# Altium PCB Converter_Module_PT100_V2l1.PcbDoc
Units mm, origin at the board's own origin, x right, y up, seen from the top; angles counter-clockwise.
Board outline 41 x 41 mm, 4 copper layers (L1, L2(GND), L3(PWR), L4), stack 0.778 mm thick; 46 components, 37 nets, 172 pads, 52 vias.
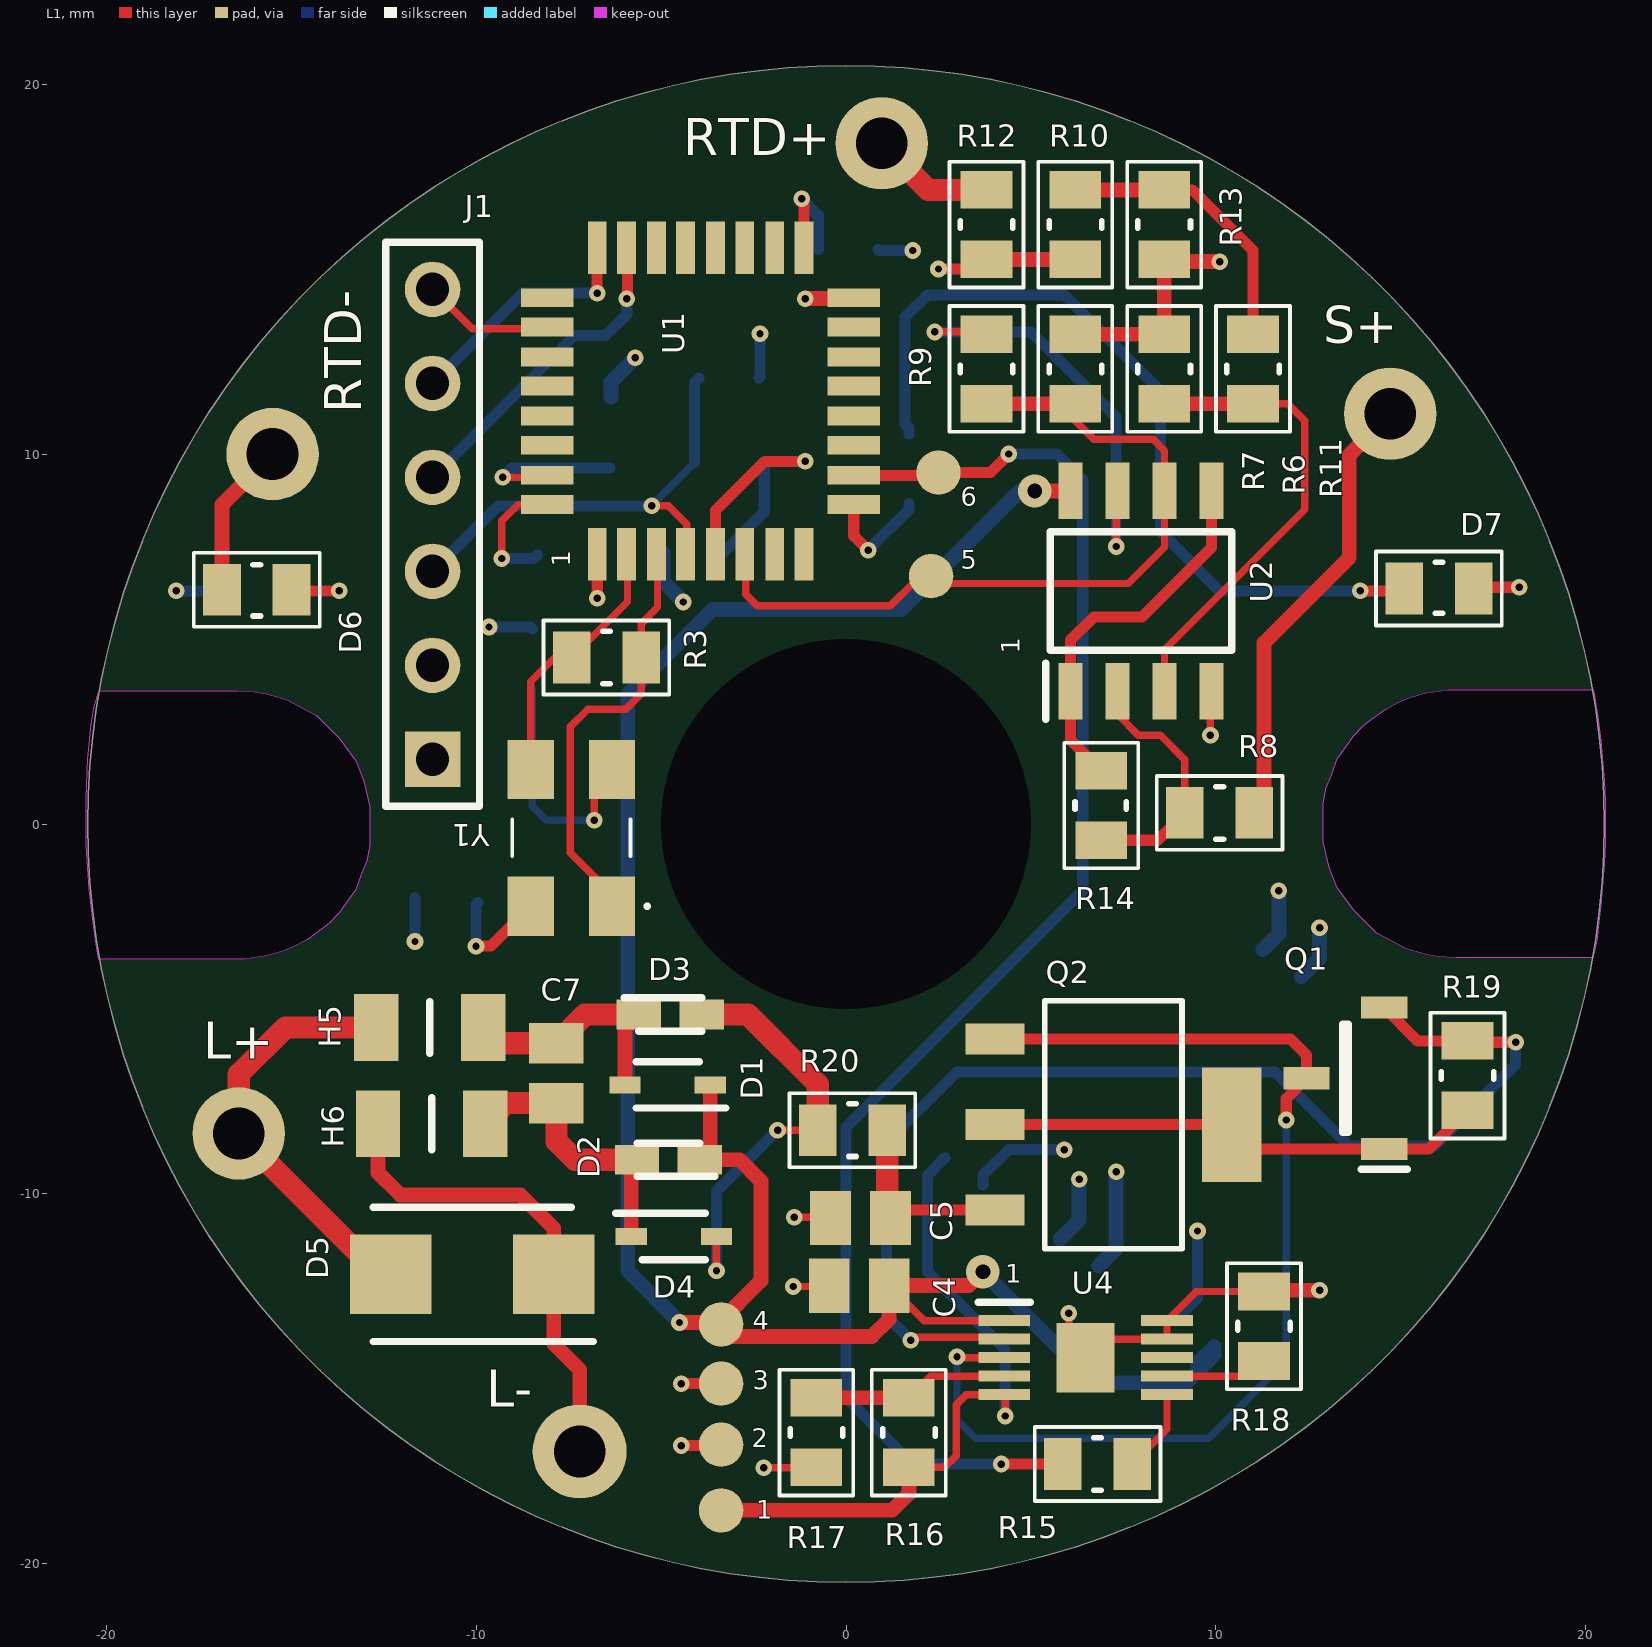
[diagram p0: L1 view]
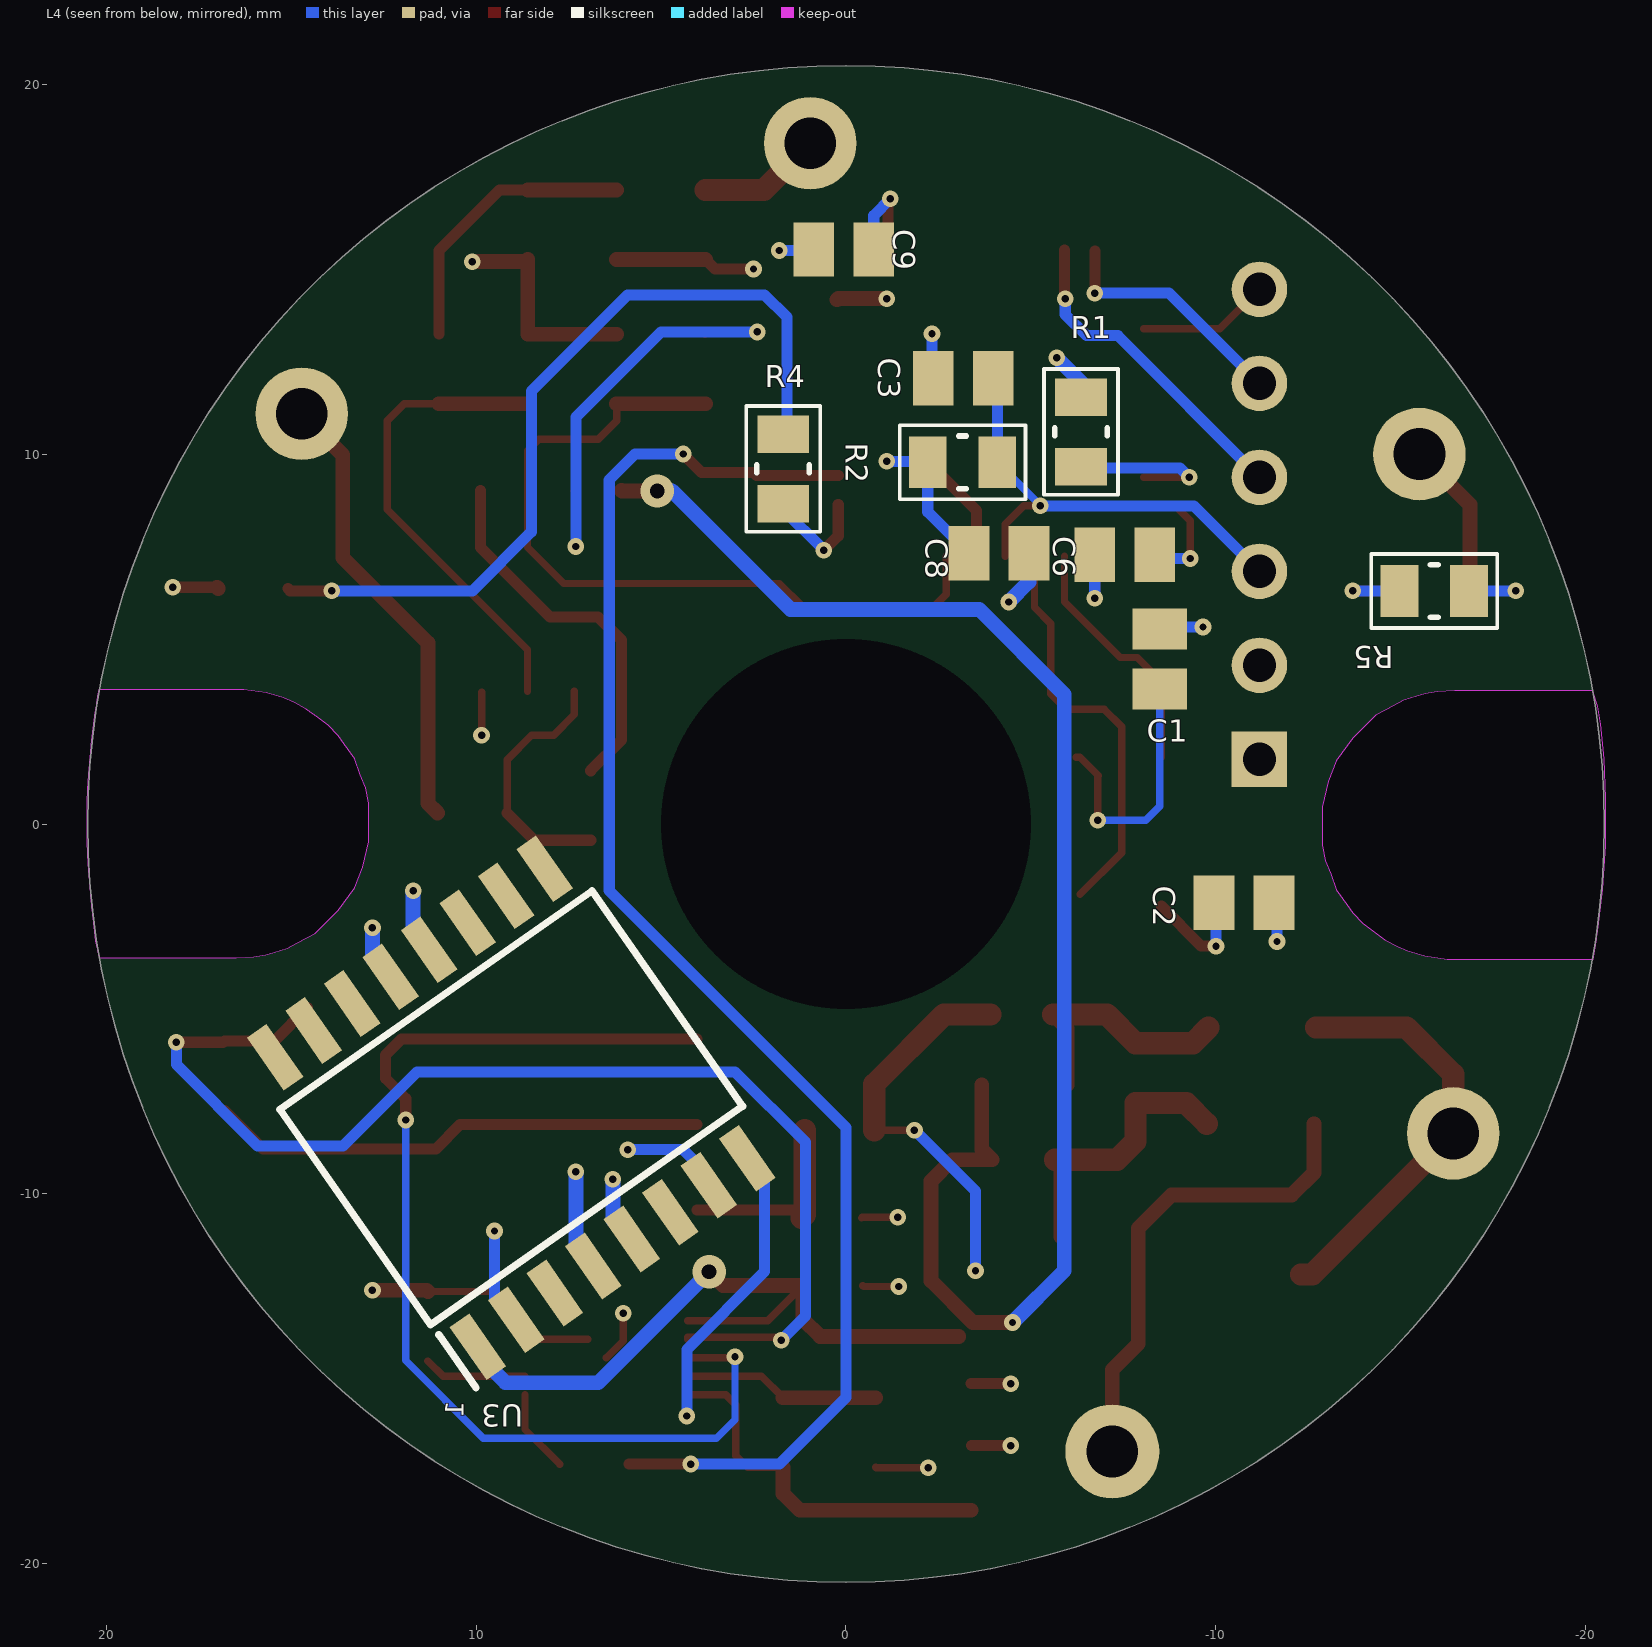
[diagram p1: L4 view, seen from below]
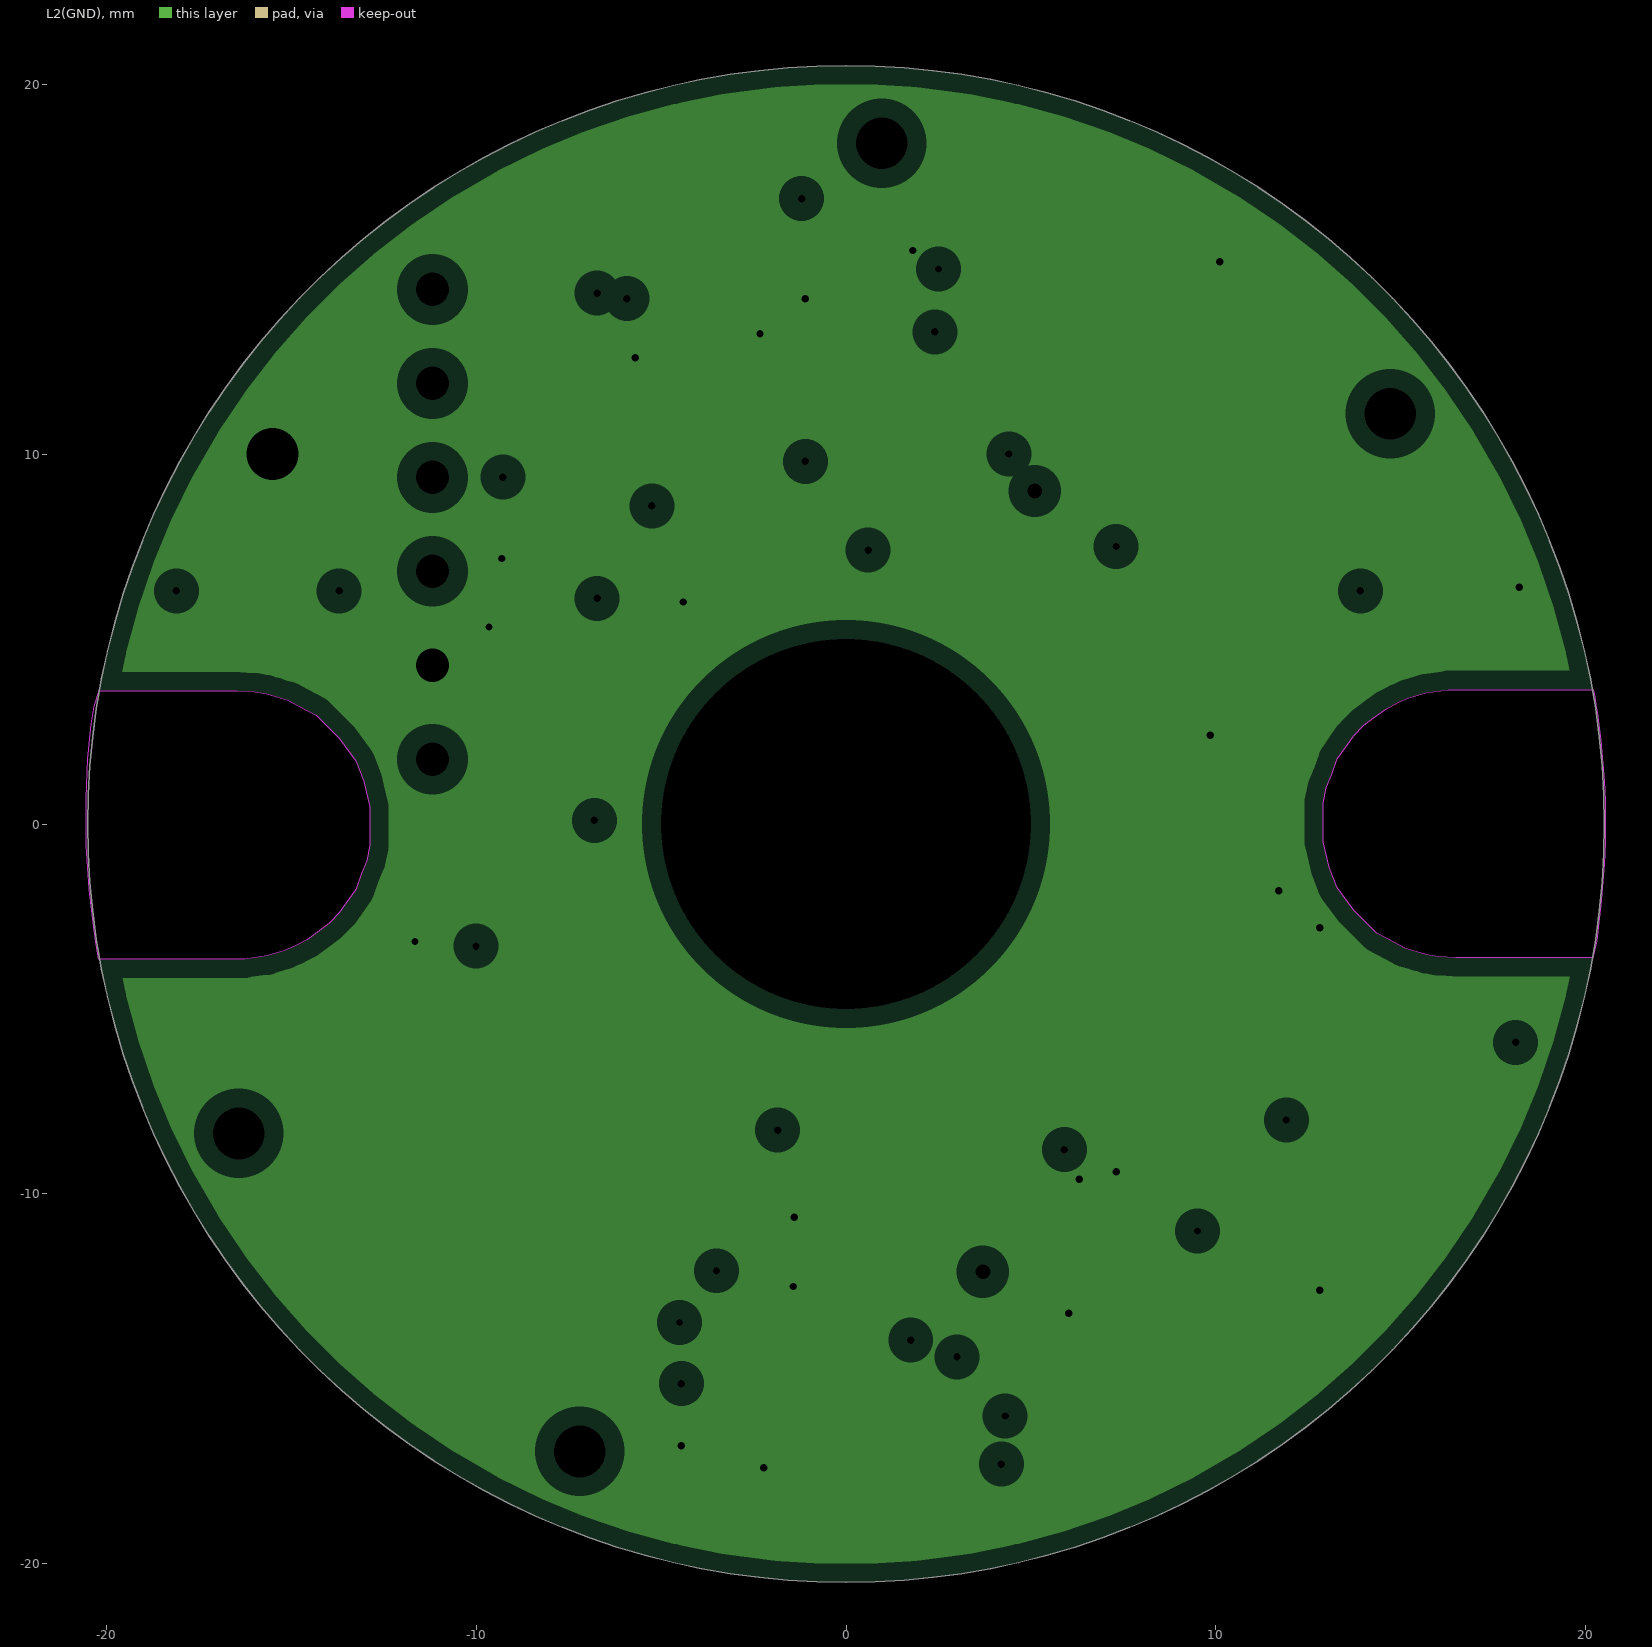
[diagram p2: L2(GND), clearances drawn from the general rule]
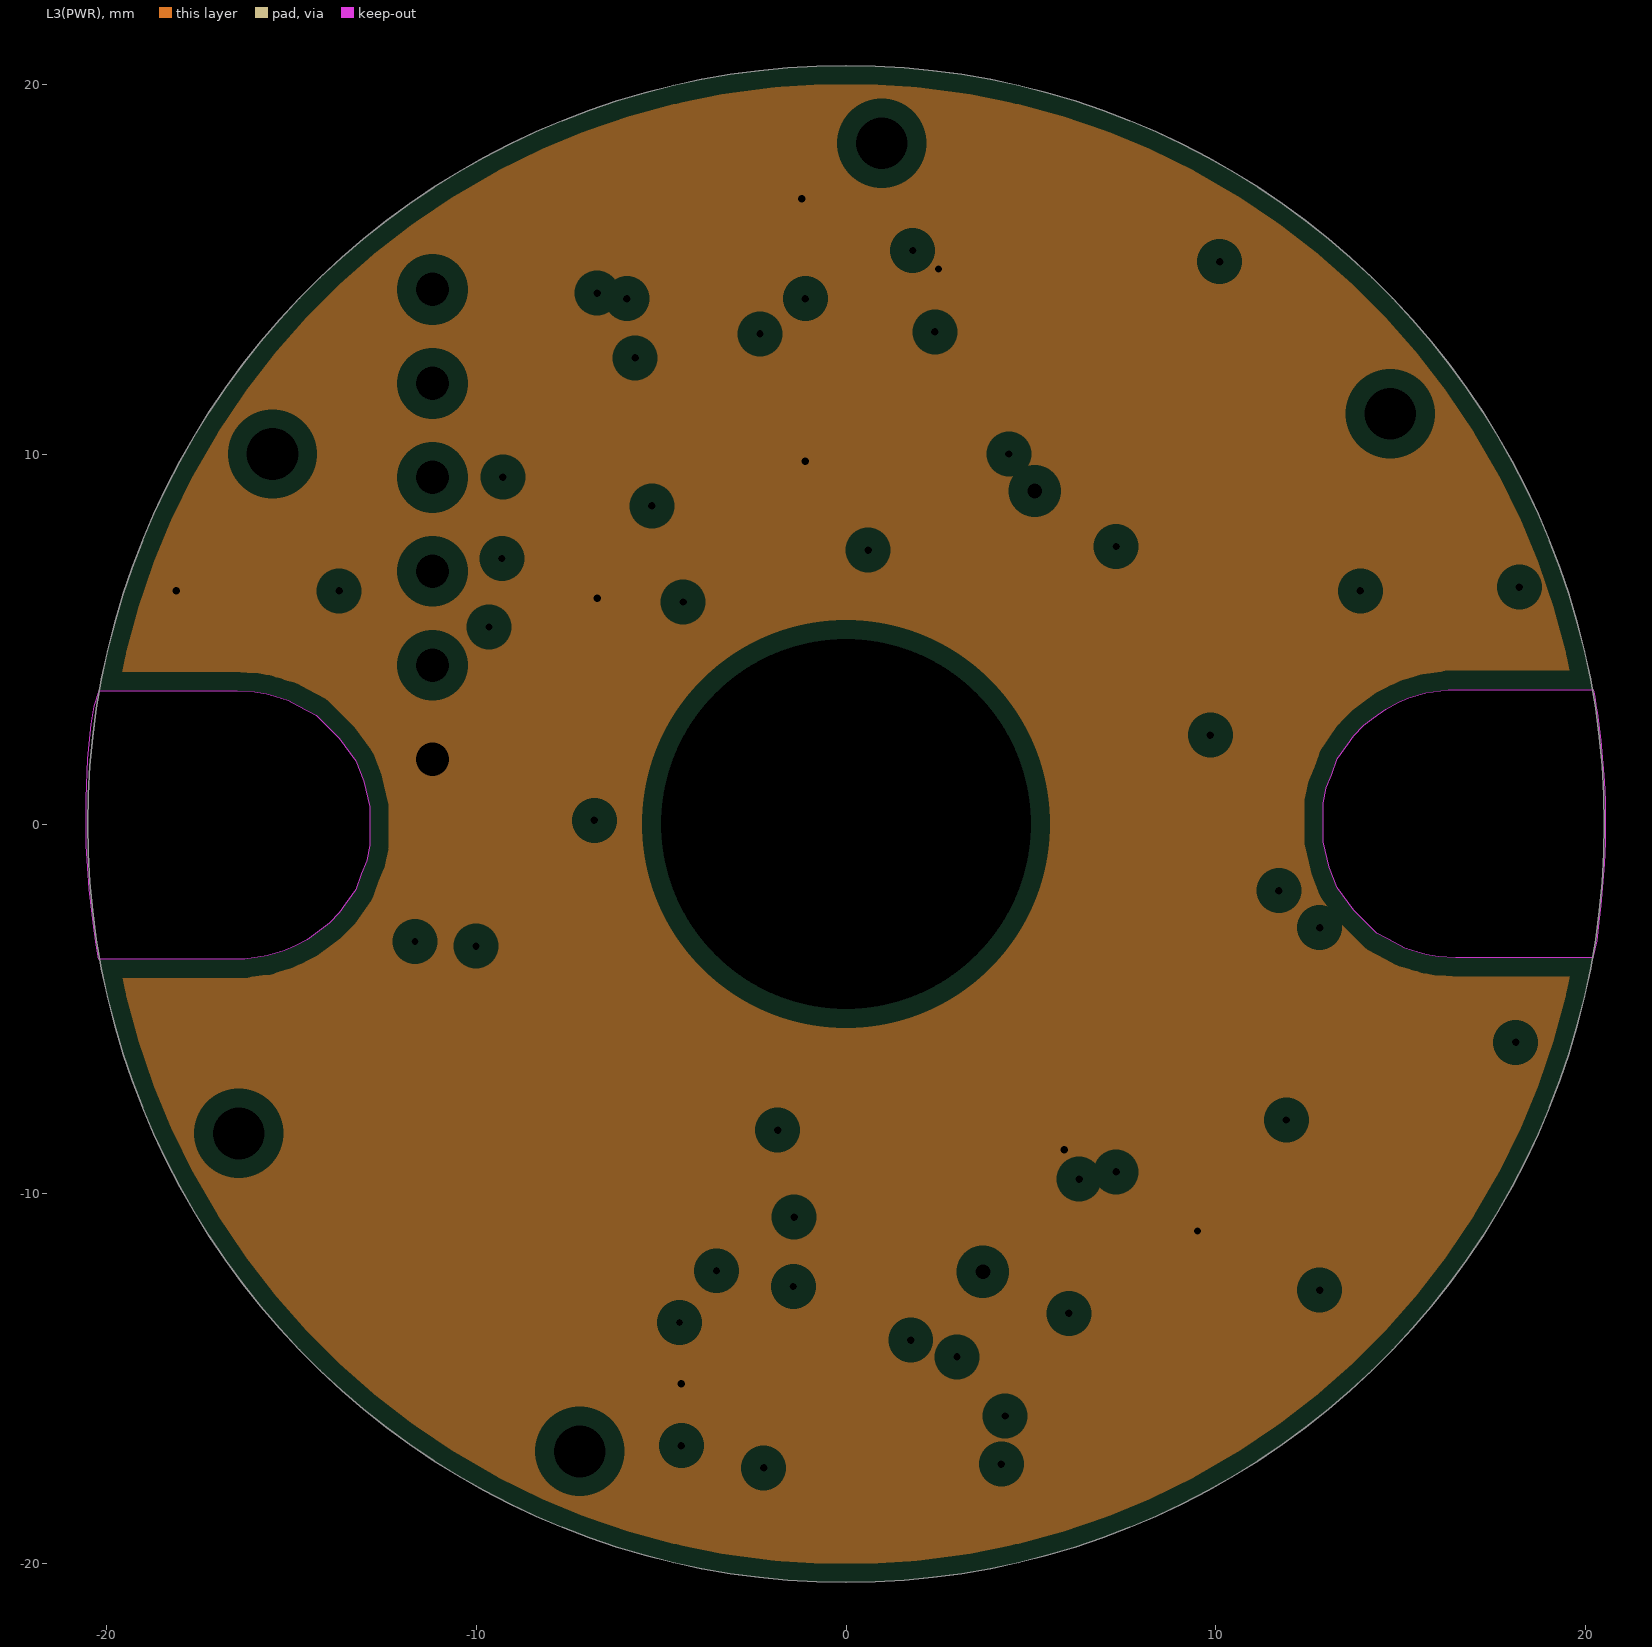
[diagram p3: L3(PWR), clearances drawn from the general rule]

## Layer stack, top to bottom
Top Solder: solder mask 0.0102, Solder Resist, Dk 3.5
L1: signal copper 0.0356
Dielectric 1: core 0.254, FR-4, Dk 4.2
L2(GND): plane copper 0.036, net GND
Dielectric 3: prepreg 0.127, Dk 4.2
L3(PWR): plane copper 0.036, net 3V3
Dielectric 2: core 0.254, Dk 4.2
L4: signal copper 0.0356
Bottom Solder: solder mask 0.0102, Solder Resist, Dk 3.5

## Board outline
-20.5,0 ccw(c0,0) 0,-20.5 ccw(c0,0) 20.5,0 ccw(c0,0) 0,20.5 ccw(c0,0)
cut-out: 20.222,3.51 20.246,3.36 20.27,3.21 20.302,3.004 20.398,2.26 20.489,1.159 20.525,0.625 20.525,0.1 20.525,-0.5 20.5,-1.075 20.398,-2.192 20.347,-2.655 20.294,-3.151 20.183,-3.615 16.483,-3.615 16.008,-3.59 15.678,-3.531 15.458,-3.465 15.098,-3.358 14.833,-3.215 14.345,-2.953 13.72,-2.328 13.275,-1.729 13.058,-1.165 12.895,-0.478 12.895,0.16 12.895,0.56 12.983,0.985 13.133,1.335 13.275,1.76 13.558,2.16 13.72,2.39 13.999,2.668 14.27,2.872 14.584,3.108 14.933,3.285 15.208,3.41 15.674,3.552 16.271,3.635 20.198,3.635
cut-out: -15.981,3.575 -15.651,3.516 -15.431,3.45 -15.071,3.343 -14.806,3.2 -14.318,2.937 -13.693,2.312 -13.248,1.714 -13.031,1.15 -12.868,0.463 -12.868,-0.175 -12.868,-0.575 -12.956,-1 -13.106,-1.35 -13.248,-1.775 -13.531,-2.175 -13.693,-2.405 -13.972,-2.684 -14.243,-2.887 -14.557,-3.123 -14.906,-3.3 -15.181,-3.425 -15.646,-3.567 -16.244,-3.65 -20.2,-3.65 -20.27,-3.269 -20.328,-2.783 -20.45,-1.768 -20.531,-0.575 -20.531,0.676 -20.488,1.767 -20.4,2.7 -20.314,3.183 -20.181,3.6 -16.456,3.6

## Design rules (kind name [scope] priority, off if disabled: settings)
Clearance [All] p1: gap=0.15
PlaneClearance [All] p1: clearance=0.508
PlaneConnect [All] p1: planeconnectstyle=Relief reliefexpansion=0.508 reliefentries=4 reliefconductorwidth=0.254 reliefairgap=0.254
PolygonConnect [All] p1: connectstyle=Relief reliefconductorwidth=0.254 reliefentries=4 polygonreliefangle="90 Angle" airgapwidth=0.254
RoutingVias [All] p1: holewidth=0.2 width=0.45 viastyle="Through Hole" minholewidth=0.09 minwidth=0.24 maxholewidth=4 maxwidth=4
SolderMaskExpansion [All] p1: expansion=0.102
Width [All] p1: maxlimit=8 minlimit=0.2 preferedwidth=0.3
28 further rules are at their usual default settings.

## Components (designator, comment, footprint, x,y, rotation, side; value= is the part's Value field where it differs from the comment)
C1 "18pF" C0805 -8.55,4.5 r270 bottom
C2 "18pF" C0805 -10.8,-2.2 r0 bottom
C3 "0.01uF" C0805 -3.125,12.125 r180 bottom
C4 "0.1uF" C0805 0.4,-12.55 r180 top
C5 "0.1uF" C0805 0.35,-10.575 r0 top
C6 "10uF" C0805 -7.575,7.2 r0 bottom
C7 "0.01uF(10nF)" PCBComponent_1 -7.9,-6.775 r90 top
C8 "10uF" C0805 -4.175,7.25 r0 bottom
C9 "10uF" C0805 0.1,15.6 r180 bottom
D1 "BAT46WJ,115" BAT46WJ,115 -4.75,-7.075 r180 top
D2 "CDSU101A" CDSU101A -4.8,-9.075 r180 top
D3 "CDSU101A" CDSU101A -4.75,-5.15 r0 top
D4 "BAT46WJ,115" BAT46WJ,115 -4.725,-11.125 r0 top
D5 "SM6T39CA" SM6T39CA -10.1,-12.175 r180 top
D6 "599-0130-007F" LED0805 -15.9,6.3 r180 top
D7 "599-0130-007F" LED0805 16,6.4 r0 top
H5 "MI1206K601R" MI1206K601R -11.25,-5.5 r180 top
H6 "MI1206K601R" MI1206K601R -11.2,-8.1 r180 top
J1 "Header 6" HDR1X6 -11.175,1.75 r90 top
Q1 "BJT" SMMBT2907ALT3G 15.3,-4.5 r180 top
Q2 "BSP613PH6327XTSA1" BSP613PH6327XTA1 7.1,-8 r0 top
R1 "10k" R0805 -6.35,10.6 r270 bottom
R2 "10k" R0805 -3.15,9.775 r180 bottom
R3 "1M" R0805 -6.475,4.5 r180 top
R4 "470" R0805 1.7,9.6 r90 bottom
R5 "470" R0805 -15.9,6.3 r180 bottom
R6 "10k" R0805 8.6,12.3 r270 top
R7 "1k" R0805 6.2,12.3 r90 top
R8 "1k" R0805 10.1,0.3 r180 top
R9 "10k" R0805 3.8,12.3 r90 top
R10 "100" R0805 6.2,16.2 r270 top
R11 "1k" R0805 11,12.3 r270 top
R12 "100" R0805 3.8,16.2 r270 top
R13 "100" R0805 8.6,16.2 r90 top
R14 "10K" R0805 6.9,0.5 r90 top (schematic designator R?)
R15 "10K" R0805 6.8,-17.3 r180 top
R16 "1.2K" R0805 1.7,-16.45 r90 top
R17 "12K" R0805 -0.8,-16.45 r90 top
R18 "1.5K" R0805 11.3,-13.575 r90 top
R19 "15" R0805 16.8,-6.8 r90 top
R20 "15" R0805 0.175,-8.275 r0 top
U1 "STM32F303K6T6" STM32F303K6T6 -0.45,7.9 r90 top
U2 "LM358DR" LM358DR 7.975,6.3 r90 top
U3 "TCA0372DWG" TCA0372DWG 8.975,-7.775 r55 bottom
U4 "XTR111AIDGQT" XTR111AIDGQT 6.475,-14.425 r0 top
Y1 "8 MHz" ECS-80-18-30B-AGN -7.425,-0.175 r90 top

## Footprints (in the part's own frame and the unit in brackets; to place one, negate y for a bottom-side part, rotate by r counter-clockwise, add the part's x,y. Pads: shape width x height; smd on the part's side, far side on the other; paste and mask are expansions set on the pad)
BAT46WJ,115 [mm] "Schottky Diodes & Rectifiers Schottky Diodes 100V 250mA Single"
  rect 0.84x0.46 smd: 1(-1.08,-0.023) 2(1.22,-0.023)
  silkscreen extent -1.5,-0.65 0.92,0.6
BSP613PH6327XTA1 [mil]
  rect 63x33 smd: 1(-121,86) 2(-121,-5) 3(-121,-96)
  rect 63x122 smd: 4(131,-5)
  silkscreen extent -68,-137 78,127
C0805 [mm]
  rect 1.1x1.47 smd: 1(-0.769,-0.073) 2(0.851,-0.073)
  body extent -1.02,-0.67 1.12,0.53, height 0.5
CDSU101A [mm] "Diodes - General Purpose, Power, Switching 100mA 80V Sm Sgnl Switching"
  rect 1.2x0.8 smd: 1(-0.85,0) 2(0.85,0)
  silkscreen extent -1.25,-0.45 0.85,0.45
ECS-80-18-30B-AGN [mm] "Crystals 8MHz 25ppm 18pF -40C +85C"
  rect 1.6x1.25 smd: 1(-2.048,-1.101) 2(1.652,-1.101) 3(1.652,1.099) 4(-2.048,1.099)
  silkscreen extent -2.1,-2.1 0.3,1.6, body extent -2.7,-1.6 2.3,1.6, height 0.85
HDR1X6 [mm] "Connector; Header; 6 Position"
  rect 1.5x1.5 hole 0.9: 1(0,0)
  round 1.5 hole 0.9: 2(2.54,0) 3(5.08,0) 4(7.62,0) 5(10.16,0) 6(12.7,0)
  silkscreen extent -1.27,-1.27 13.97,1.27
LED0805 [mil]
  rect 40x55 smd: 1(-35.94,-1.3) 2(38.06,-1.3)
  silkscreen extent -66,-41 68,38, body extent -38,-26 41,24, height 39
LM358DR [mm]
  rect 1.525x0.65 smd: 1(-2.712,1.905) 2(-2.712,0.635) 3(-2.712,-0.635) 4(-2.712,-1.905) 5(2.712,-1.905) 6(2.712,-0.635) 7(2.712,0.635) 8(2.712,1.905)
  silkscreen extent -3.48,-2.45 1.6,2.58, body extent -2.54,-2.48 2.54,2.35, height 0
MI1206K601R [mm] "Ferrite Beads 600ohms 100MHz 1.5A Monolithic 1206 SMD"
  rect 1.2x1.8 smd: 1(-1.45,0) 2(1.45,0)
  silkscreen extent 0,-0.7 0,0.7
PCBComponent_1 [mm]
  rect 1.1x1.47 smd: 1(-0.769,-0.073) 2(0.851,-0.073)
  body extent -1.2,-0.8 1.2,0.6, height 0.5
R0805 [mil]
  rect 40x55 smd: 1(-37,0) 2(37,0)
  silkscreen extent -67,-39 67,39
SM6T39CA [mm] "ESD Suppressors / TVS Diodes 600W 39V Bidirect"
  rect 2.2x2.15 smd: 1(-2.2,0) 2(2.2,0)
  silkscreen extent -3.28,-1.81 2.67,1.81
SMMBT2907ALT3G [mm] "Bipolar Transistors - BJT SS GP XSTR SPCL TR"
  rect 1.25x0.6 smd: 1(0.75,4.282) 2(0.75,0.462) 3(2.85,2.372)
  silkscreen extent 0.13,0.91 1.88,4.83, body extent 0.68,0.24 2.95,4.51, height 1.11
STM32F303K6T6 [mil] "ARM Microcontrollers - MCU 16/32-BITS MICROS"
  rect 56x20 smd: 1(-24,247) 2(-24,216) 3(-24,184) 4(-24,153) 5(-24,121) 6(-24,90) 7(-24,58) 8(-24,27) 17(302,27) 18(302,58) 19(302,90) 20(302,121) 21(302,153) 22(302,184) 23(302,216) 24(302,247)
  rect 20x56 smd: 9(29,-26) 10(60,-26) 11(92,-26) 12(123,-26) 13(155,-26) 14(186,-26) 15(218,-26) 16(249,-26) 25(249,300) 26(218,300) 27(186,300) 28(155,300) 29(123,300) 30(92,300) 31(60,300) 32(29,300)
  body extent -38,-41 317,315, height 63
TCA0372DWG [mm]
  rect 1.75x0.65 smd: 1(-4.648,4.445) 2(-4.648,3.175) 3(-4.648,1.905) 4(-4.648,0.635) 5(-4.648,-0.635) 6(-4.648,-1.905) 7(-4.648,-3.175) 8(-4.648,-4.445) 9(4.902,-4.445) 10(4.902,-3.175) 11(4.902,-1.905) 12(4.902,-0.635) 13(4.902,0.635) 14(4.902,1.905) 15(4.902,3.175) 16(4.902,4.445)
  silkscreen extent -5.52,-5.15 3.68,5.15
XTR111AIDGQT [mm]
  rect 1.4x0.3 smd: 1(-2.2,1) 2(-2.2,0.5) 3(-2.2,0) 4(-2.2,-0.5) 5(-2.2,-1) 6(2.2,-1) 7(2.2,-0.5) 8(2.2,0) 9(2.2,0.5) 10(2.2,1)
  rect 1.57x1.88 smd: 11(0,0)
  silkscreen extent -2.9,1.5 -1.5,1.5

## Part data
C1 C2: library part VJ0805A180KXQPW1BC, "Multilayer Ceramic Capacitors MLCC - SMD/SMT 0805 18pF 10volts C0G 10%"
C3: library part AS0805KRX7R9BB103, "Multilayer Ceramic Capacitors MLCC - SMD/SMT 0.01uF 10% 50V AEC-Q200"
C4 C5: library part AS0805KKX7R9BB104, "Multilayer Ceramic Capacitors MLCC - SMD/SMT 0.1uF 10% 50V AEC-Q200"
C6 C8 C9: library part C0603C106M8PACTU, "Multilayer Ceramic Capacitors MLCC - SMD/SMT 10V 10uF 0603 X5R 20%"
C7: library part C0805X103K1GECAUTO, "Multilayer Ceramic Capacitors MLCC - SMD/SMT 100V 0.01uF C0G 0805 10% AEC-Q200"
D1 D4: "Schottky Diodes & Rectifiers Schottky Diodes 100V 250mA Single"
D2 D3: "Diodes - General Purpose, Power, Switching 100mA 80V Sm Sgnl Switching"
D5: "ESD Suppressors / TVS Diodes 600W 39V Bidirect"
D6 D7: "Standard LEDs - SMD SMD 0805 ORANGE"
H5 H6: library part MI1206K601R-10, "Ferrite Beads 600ohms 100MHz 1.5A Monolithic 1206 SMD"
J1: "Header, 6-Pin"
Q1: library part SMMBT2907ALT3G, "Bipolar Transistors - BJT SS GP XSTR SPCL TR"
Q2: "MOSFET P-Ch -60V -2.9A SOT-223-3"
R1 R2 R6 R9: library part RT0603FRE0710KL, "Thin Film Resistors - SMD 10K ohm 1% 1/10W"
R3: library part AT0805DRD071ML, "Thin Film Resistors - SMD 1 Mohm 0.5% Tol. AEC-Q200"
R4 R5: library part RT0603FRE07470RL, "Thin Film Resistors - SMD 1/10W 470 ohm 1% 50ppm"
R7 R8 R11: library part RT0603FRE071KL, "Thin Film Resistors - SMD 1K ohm 1% 1/10W"
R10 R12 R13: library part RT0603FRE07100RL, "Thin Film Resistors - SMD 1/10W 100 ohm 1% 50ppm"
R14 R15: library part RC0805FR-7W10KL, "Thick Film Resistors - SMD 10K   OHM   1% 1/4W"
R16: library part RCS08051K20FKEA, "Thick Film Resistors - SMD 0.4watt 1.2Kohms 1% 100ppm"
R17: library part RC0805FR-0712KL, "Thick Film Resistors - SMD 12K OHM 1%"
R18: library part RT0805FRE101K5L, "Thin Film Resistors - SMD 1.5K ohm 1% 50 ppm Thin Film"
R19 R20: library part AT0805BRD0715RL, "Thin Film Resistors - SMD 15 Ohms 0.1% Tol. AEC-Q200"
U1: "ARM Microcontrollers - MCU 16/32-BITS MICROS"
U2: "Operational Amplifiers - Op Amps Dual Op Amp"
U3: "Operational Amplifiers - Op Amps 5-40V 1A Output Extended Temp"
U4: "Sensor Interface Prec Vltg-to-Crnt Conv/Transmitter"
Y1: library part ECS-80-18-30B-AGN-TR, "Crystals 8MHz 25ppm 18pF -40C +85C"

## Free pads (board coordinates)
  round 2.54 hole 1.4: 7(-7.198,-16.958)
  round 2.5 hole 1.4: 8(-16.415,-8.364) 9(-15.5,10) 10(0.964,18.398) 11(14.713,11.087)
  round 1.2 smd: 8(2.3,6.7) 9(2.5,9.5) 10(-3.375,-15.125) 11(-3.375,-13.525) 12(-3.375,-16.775) 13(-3.375,-18.55)
  round 1.524 hole 10: 9(0,0)

## Via types
v1: diameter 0.45, hole 0.2, L1 to L4, 50 vias
v2: diameter 0.9, hole 0.4, L1 to L4, 2 vias

## Nets (pads, with @x,y where several pads share a name; then routed paths per layer and width w, separated by ;. In a path a pad name is that pad's centre, name@x,y a point inside that pad or via, vN(x,y) a via of type N, cw(c..) or ccw(c..) an arc to the next point about the centre after c; other vN are vias at no path point)
3V3: C6.2 C8.2 C9.2 J1.1 pad.10@-3.375,-15.125 R2.1 R5.2 R10.2 R12.2 U1.1 U1.5 U1.17 U3.2 U3.7 | length 24.9
  L1 w0.2: U1.5@-3.5,7.228 U1.5@-3.494,7.235
  L1 w0.3: v1(-6.725,6.1) v1(-6.725,6.1) U1.1 ; v1(-4.45,-15.125) pad.10@-3.375,-15.125 ; U1.5 -3.523,8.477 -2.2,9.8 v1(-1.1,9.8) ; U1.17 v1@-1.136,16.836 ; v1(2.5,15) 3.54,15 R12.2
  L1 w0.4: R12.2 R10.2
  L4 w0.3: v1(-18.1,6.3) R5.2 ; v1(-6.725,6.1) v1(-6.725,6.1) C6.2 ; C8.2 -2.21,8.437 R2.1 -2.185,9.8 v1(-1.1,9.8) ; v1(-1.2,16.9) -0.751,16.451 C9.2 ; U3.7 3.708,-9.492 4.4,-8.8 v1(5.9,-8.8) ; U3.2 9.5,-12.813 v1(9.5,-11)
24V: C4.1 D1.1 D2.1 pad.11@-3.375,-13.525 U2.8 U3.1 U4.1 | length 61.4
  L1 w0.2: C4.1 2.117,-13.425 U4.1
  L1 w0.4: v1(-4.5,-13.475) -3.425,-13.475 -2.3,-12.35 -2.3,-9.65 -2.875,-9.075 D2.1 -3.67,-8.795 D1.1 ; pad.11@-3.05,-13.85 0.7,-13.85 1.169,-13.381 C4.1 3.323,-12.477 v2(3.7,-12.1) ; v2(5.1,9) 6.058,9 U2.8
  L4 w0.4: v1(-4.5,-13.475) -5.9,-12.075 -5.9,3.5 -3.6,5.8 1.5,5.8 4.7,9 v2(5.1,9) ; v2(3.7,-12.1) 6.7,-15.1 9.2,-15.1 9.95,-14.35 U3.1 U3.1@9.5,-14.582
+INPUTB: pad.13 R16.1 U3.8 U4.5 | length 18.8
  L1 w0.2: R16.1 2.66,-17.39 2.975,-17.075 2.975,-15.7 3.25,-15.425 U4.5 4.3,-15.45 v1(4.3,-16)
  L1 w0.4: pad.13 1.25,-18.55 1.7,-18.1 R16.1
  L4 w0.3: U3.8 2.2,-9.501 2.2,-12.1 4.3,-14.2 v1(4.3,-16)
ADC_IN: pad.8@2.3,6.7 R7.1 R9.1 U1.6 U2.6 | length 21.3
  L1 w0.2: U1.6@-2.706,7.235 -2.706,6.206 -2.4,5.9 1.2,5.9 1.8,6.5 7.625,6.5 8.61,7.485 U2.6 8.61,10.09 8.3,10.4 6.7,10.4 6.2,10.9 R7.1
  L1 w0.4: R9.1 R7.1
DAC_OUT: pad.9@2.5,9.5 R15.2 U1.10 | length 40.8
  L1 w0.3: U1.10 2.424,9.424 2.5,9.5 3.9,9.5 v1(4.4,10) ; v1(4.2,-17.3) R15.2
  L4 w0.3: v1(4.2,-17.3) 1.8,-17.3 0,-15.5 0,-8.2 6.4,-1.8 6.4,9.3 5.7,10 v1(4.4,10)
GND: C1.1 C2.1 C3.1 C4.2 C5.1 C6.1 C8.1 C9.1 D6.2 D7.2 J1.2 pad.9@-15.5,10 pad.12 R1.1 R6.1 R7.2 R13.1 R17.1 R18.2 U1.16 U1.32 U2.4 U3.4 U3.5 U3.12 U3.13 U4.9 U4.10 U4.11 | length 45.2
  L1 w0.2: v1(-9.3,7.175) -9.3,8.2 -8.863,8.637 U1.32 ; pad.12@-3.4,-16.8 pad.12 ; v1(-2.225,-17.4) -0.81,-17.4 R17.1 ; v1(-1.425,-12.5) -0.474,-12.5 C4.2 ; v1(-1.4,-10.625) -0.442,-10.625 C5.1 ; v1(6.025,-13.225) 6.025,-13.975 U4.11 ; U4.11@6.975,-13.925 U4.9 U4.10 9.465,-12.635 R18.2 ; v1(9.85,2.4) U2.4@9.85,3.558
  L1 w0.3: v1(-4.45,-16.8) pad.12@-3.4,-16.8 ; U1.16@0.24,14.169 U1.16@0.271,14.2 ; D7.2@17,6.4 v1(18.2,6.4)
  L1 w0.4: D6.2 -16.867,8.633 pad.9@-15.5,10 ; v1(-1.1,14.2) 0.209,14.2 U1.16@0.24,14.169 ; R7.2 R6.1 R13.1 8.66,15.2 v1(10.1,15.2) ; R18.2 11.335,-12.6 v1(12.8,-12.6) ; D7.2 D7.2@17,6.4
  L4 w0.3: v1(-11.65,-3.175) C2.1@-11.65,-1.983 ; v1(-9.65,5.325) -8.533,5.325 C1.1 ; v1(-9.3,7.175) -8.442,7.175 C6.1 ; C3.1 -2.325,12.083 v1(-2.325,13.25) ; C9.1 0.896,15.5 v1(1.8,15.5)
  L4 w0.4: R1.1 -6.35,11.95 v1(-5.7,12.6) ; C8.1 -4.944,6.544 v1(-4.4,6) ; U3.5 6.3,-10.707 v1(6.3,-9.6) ; U3.4 7.3,-11.476 v1(7.3,-9.4) ; U3.12 11.7,-2.962 v1(11.7,-1.8) ; U3.13 12.8,-3.631 v1(12.8,-2.8)
IOUT: D3.2 D4.2 R20.1 | length 11.7
  L1 w0.2: D4.2 -3.505,-12.07 v1(-3.5,-12.075) ; v1(-1.85,-8.275) R20.1
  L1 w0.6: D3.2 -2.65,-5.15 -0.765,-7.035 R20.1
  L4 w0.3: v1(-3.5,-12.075) -3.5,-9.925 v1(-1.85,-8.275)
LOOP+: D5.2 H5.2 pad.8@-16.415,-8.364 | length 11.5
  L1 w0.6: H5.2 -15.15,-5.5 -16.415,-6.765 -16.415,-8.364 -12.604,-12.175 D5.2
LOOP-: D5.1 H6.2 pad.7 | length 13
  L1 w0.4: H6.2 -12.65,-9.425 -12.05,-10.025 -8.8,-10.025 -7.9,-10.925 D5.1 -7.9,-14.05 -7.198,-14.752 pad.7
NetC1_2: C1.2 Y1.2 | length 7
  L1 w0.2: v1(-6.8,0.1) -6.8,1.277 -6.825,1.302 -6.325,1.802 Y1.2@-6.223,1.802
  L4 w0.2: C1.2 -8.477,0.477 -8.1,0.1 v1(-6.8,0.1)
NetC2_2: C2.2 Y1.4 | length 3.1
  L1 w0.3: v1(-10,-3.3) -9.601,-3.3 Y1.4
  L4 w0.3: v1(-10,-3.3) -10,-2.178 C2.2
NetC5_2: C5.2 Q2.3 R20.2 | length 5.3
  L1 w0.3: C5.2 1.411,-10.438 Q2.3
  L1 w0.6: R20.2 1.115,-10.562 C5.2
NetC7_1: C7.1 D2.2 D4.1 H6.1 | length 7.7
  L1 w0.4: D4.1 -5.805,-9.23 D2.2
  L1 w0.6: H6.1 -9.194,-7.544 C7.1 -7.827,-8.573 -7.325,-9.075 D2.2
NetC7_2: C7.2 D1.2 D3.1 H5.1 | length 6.8
  L1 w0.4: D1.2 -5.97,-5.52 D3.1
  L1 w0.6: H5.1 -9.376,-5.924 C7.2 -7.053,-5.15 D3.1
NetD6_1: D6.1 R5.1 | length 2.6
  L1 w0.3: D6.1 -14.954,6.3 v1(-13.7,6.3)
  L4 w0.3: R5.1 v1(-13.7,6.3)
NetD7_1: D7.1 R4.2 | length 22.5
  L1 w0.3: v1(13.9,6.3) 15.02,6.3 D7.1
  L4 w0.3: R4.2 1.7,10.7 1.6,10.8 1.6,13.7 2.2,14.3 5.9,14.3 8.5,11.7 8.5,7.9 10.1,6.3 v1(13.9,6.3)
NetQ1_1: Q1.1 Q2.2 Q2.4 R19.1 | length 13.5
  L1 w0.3: Q2.2 Q2.4 11.082,-8.782 Q1.1 15.758,-8.782 R19.1
NetQ1_2: Q1.2 R19.2 U4.2 | length 32.3
  L1 w0.2: v1(1.75,-13.95) 1.825,-13.875 4.275,-13.875 U4.2
  L1 w0.3: Q1.2 15.448,-5.86 R19.2 16.84,-5.9 v1(18.1,-5.9)
  L4 w0.3: v1(1.75,-13.95) 1.1,-13.3 1.1,-8.6 3,-6.7 11.6,-6.7 13.6,-8.7 15.9,-8.7 18.1,-6.5 v1(18.1,-5.9)
NetQ1_3: Q1.3 Q2.1 U4.3 | length 30
  L1 w0.2: v1(3,-14.4) 3.025,-14.425 U4.3
  L1 w0.3: Q2.1 12.016,-5.816 12.45,-6.25 Q1.3 11.9,-7.422 v1(11.9,-8)
  L4 w0.2: v1(3,-14.4) 3,-16.1 3.5,-16.6 9.8,-16.6 11.9,-14.5 v1(11.9,-8)
NetR1_2: R1.2 U1.31 | length 4.2
  L1 w0.2: v1(-9.275,9.375) -9.268,9.368 U1.31@-8.04,9.368
  L4 w0.3: v1(-9.275,9.375) -9.027,9.623 R1.2@-6.387,9.623
NetR3_1: R3.1 U1.3 Y1.1 | length 11.2
  L1 w0.2: Y1.1@-6.325,-1.898 -7.45,-0.773 -7.45,2.625 -6.975,3.1 -5.95,3.1 -5.535,3.515 R3.1 -5.535,5.415 -5.094,5.856 U1.3@-5.094,7.235
NetR3_2: R3.2 U1.2 Y1.3 | length 6.8
  L1 w0.2: Y1.3@-8.525,1.802 -8.525,3.85 -7.875,4.5 R3.2 -5.907,6.008 U1.2@-5.907,7.235
NetR6_2: R6.2 R11.2 U2.3 | length 12.9
  L1 w0.2: U2.3 8.61,4.71 12.4,8.5 12.4,10.9 11.94,11.36 R11.2
  L1 w0.4: R6.2 R11.2
NetR8_2: R8.2 R14.1 U2.2 | length 7
  L1 w0.2: U2.2 7.34,2.96 7.9,2.4 8.5,2.4 9.16,1.74 R8.2
  L1 w0.3: R14.1 8.42,-0.44 R8.2
NetR9_2: R9.2 U2.7 | length 12.3
  L1 w0.2: v1(2.4,13.3) 3.74,13.3 R9.2 ; v1(7.3,7.5) 7.3,8.972 U2.7
  L4 w0.3: v1(2.4,13.3) 5,13.3 7.3,11 v1(7.3,7.5)
NetR10_1: R10.1 R11.1 R13.2 | length 7.7
  L1 w0.3: R13.2 9.36,17.14 11,15.5 R11.1
  L1 w0.4: R10.1 R13.2
NetR14_2: R14.2 U2.1 U2.5 | length 10.3
  L1 w0.3: R14.2 6.07,2.27 U2.1 6.07,4.97 6.7,5.6 8,5.6 9.88,7.48 U2.5
NetR15_1: R15.1 U4.6 | length 2.3
  L1 w0.2: R15.1 8.675,-16.365 U4.6
NetR16_2: R16.2 R17.2 U4.4 | length 5.3
  L1 w0.2: R16.2 2.285,-14.925 U4.4
  L1 w0.4: R17.2 R16.2
NetR18_1: R18.1 U4.7 | length 2.8
  L1 w0.2: U4.7 10.89,-14.925 R18.1
NRST: C3.2 J1.3 R2.2 U1.4 | length 12.7
  L1 w0.2: v1(-5.25,8.6) -4.8,8.6 -4.306,8.106 U1.4@-4.306,7.235
  L4 w0.2: v1(-5.25,8.6) -5.25,8.615 R2.2
  L4 w0.3: J1.3 -9.405,8.6 v1(-5.25,8.6) ; R2.2 -4.09,11.938 C3.2
RTD+: pad.10@0.964,18.398 R12.1 | length 3.4
  L1 w0.6: pad.10@0.964,18.398 2.222,17.14 R12.1
S+: pad.11@14.713,11.087 R8.1 | length 12.3
  L1 w0.4: R8.1 11.3,0.56 11.3,4.9 13.6,7.2 13.6,9.974 pad.11@14.713,11.087
S_LED: R4.1 U1.9 | length 3.1
  L1 w0.3: U1.9 0.21,7.79 v1(0.6,7.4)
  L4 w0.3: v1(0.6,7.4) 1.7,8.5 R4.1
SWCLK: J1.5 U1.24 | length 6.6
  L1 w0.2: U1.24@-6.725,15.484 U1.24@-6.694,15.515
  L1 w0.3: v1(-6.725,14.35) U1.24@-6.725,15.484
  L4 w0.3: J1.5 -8.735,14.35 v1(-6.725,14.35)
SWDIO: J1.4 U1.23 | length 8.8
  L1 w0.2: v1(-5.925,14.2) v1@-5.907,14.218
  L1 w0.3: v1@-5.907,14.218 U1.23@-5.907,15.515
  L4 w0.3: J1.4 -7.345,13.2 -6.5,13.2 -5.925,13.775 v1(-5.925,14.2)
SWO: J1.6 U1.26 | length 3.6
  L1 w0.2: J1.6 -10.107,13.382 U1.26@-8.04,13.382
pads on no net: U1.7 U1.8 U1.11 U1.12 U1.13 U1.14 U1.15 U1.18 U1.19 U1.20 U1.21 U1.22 U1.25 U1.27 U1.28 U1.29 U1.30 U3.3 U3.6 U3.9 U3.10 U3.11 U3.14 U3.15 U3.16 U4.8

## Polygon pours and split planes (outlines as drawn)
GND on L2(GND) (split plane): 274 vertices, not listed, extent -19.564,-19.99 19.561,19.99
3V3 on L3(PWR) (split plane): 274 vertices, not listed, extent -19.564,-19.99 19.561,19.99

## Silkscreen, mask and mechanical layers (free items; w line width, h text height)
Top Overlay:
  text "RTD+" at -4.4,18.075 h1
  text "S+" at 12.9,13 h1
  text "RTD-" at -13.1,11.1 h1 r90
  text "6" at 3.1,8.6 h0.5
  text "1" at -7.45,6.95 h0.5 r90
  text "5" at 3.1,6.9 h0.5
  text "1" at 4.7,4.6 h0.5 r90
  text "L+" at -17.375,-6.35 h1
  text "1" at 4.3,-12.4 h0.5
  text "4" at -2.525,-13.675 h0.5
  text "3" at -2.525,-15.275 h0.5
  text "L-" at -9.725,-15.75 h1
  text "2" at -2.55,-16.85 h0.5
  text "1" at -2.425,-18.775 h0.5
Bottom Overlay:
  text "1" at 10.325,-15.6 h0.5 r270
Board Outline:
  circle w0.254: c0,0 r5
  lines w0.254: -20.31,-3.547 ccw(c0,-0.1) 20.32,-3.485 ; -20.284,3.497 -16.103,3.497 ; -20.284,3.597 cw(c0,0) 20.29,3.561 ; -20.161,-3.522 -16.022,-3.522 ; 16.3,-3.476 20.27,-3.476 ; 16.3,3.555 20.255,3.555
  lines w0.3: -16.041,-3.471 ccw(c-16.5,0) -16.033,3.47 ; 16.214,3.488 ccw(c16.5,0) 16.223,-3.489